# Altium PCB cs301_07.PcbDoc
Units mil, origin at the board's own origin, x right, y up, seen from the top; angles counter-clockwise.
Board outline 3420 x 4960 mil, 2 copper layers (Top Layer, Bottom Layer); 122 components, 84 nets, 356 pads, 161 vias.
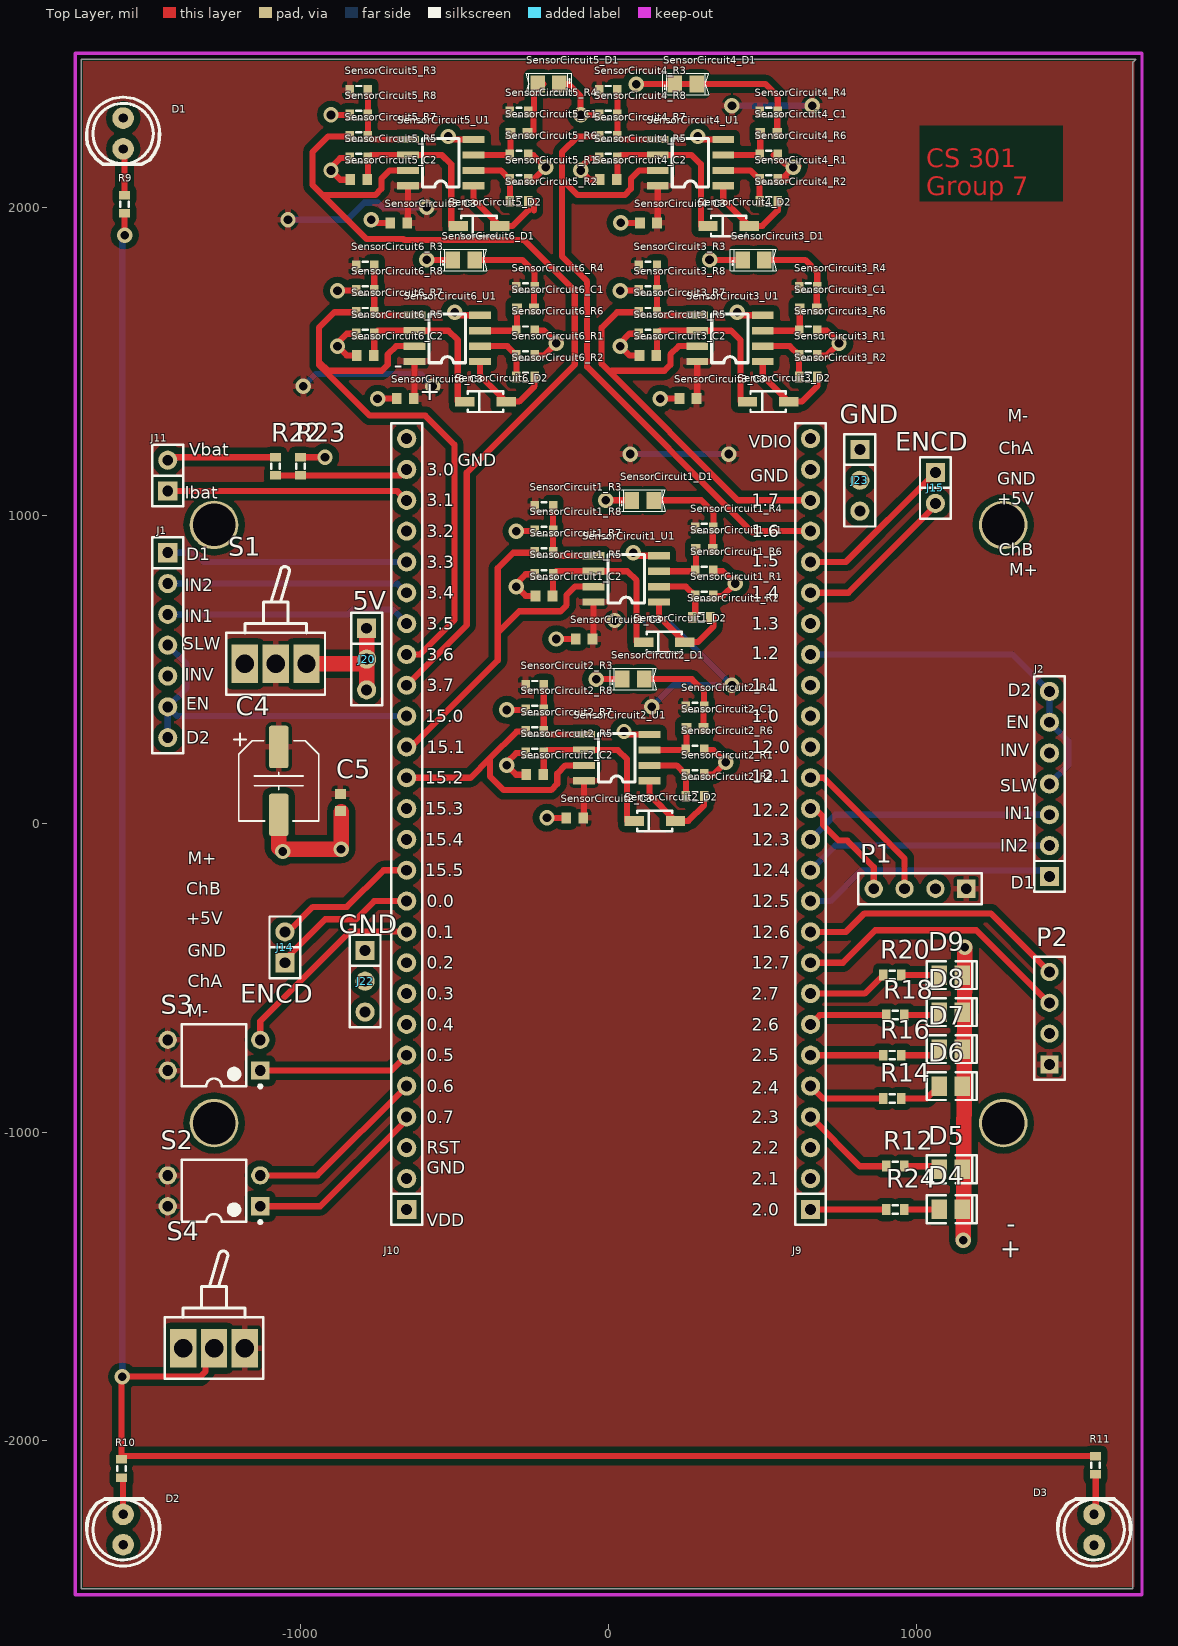
[diagram p0: Top Layer view]
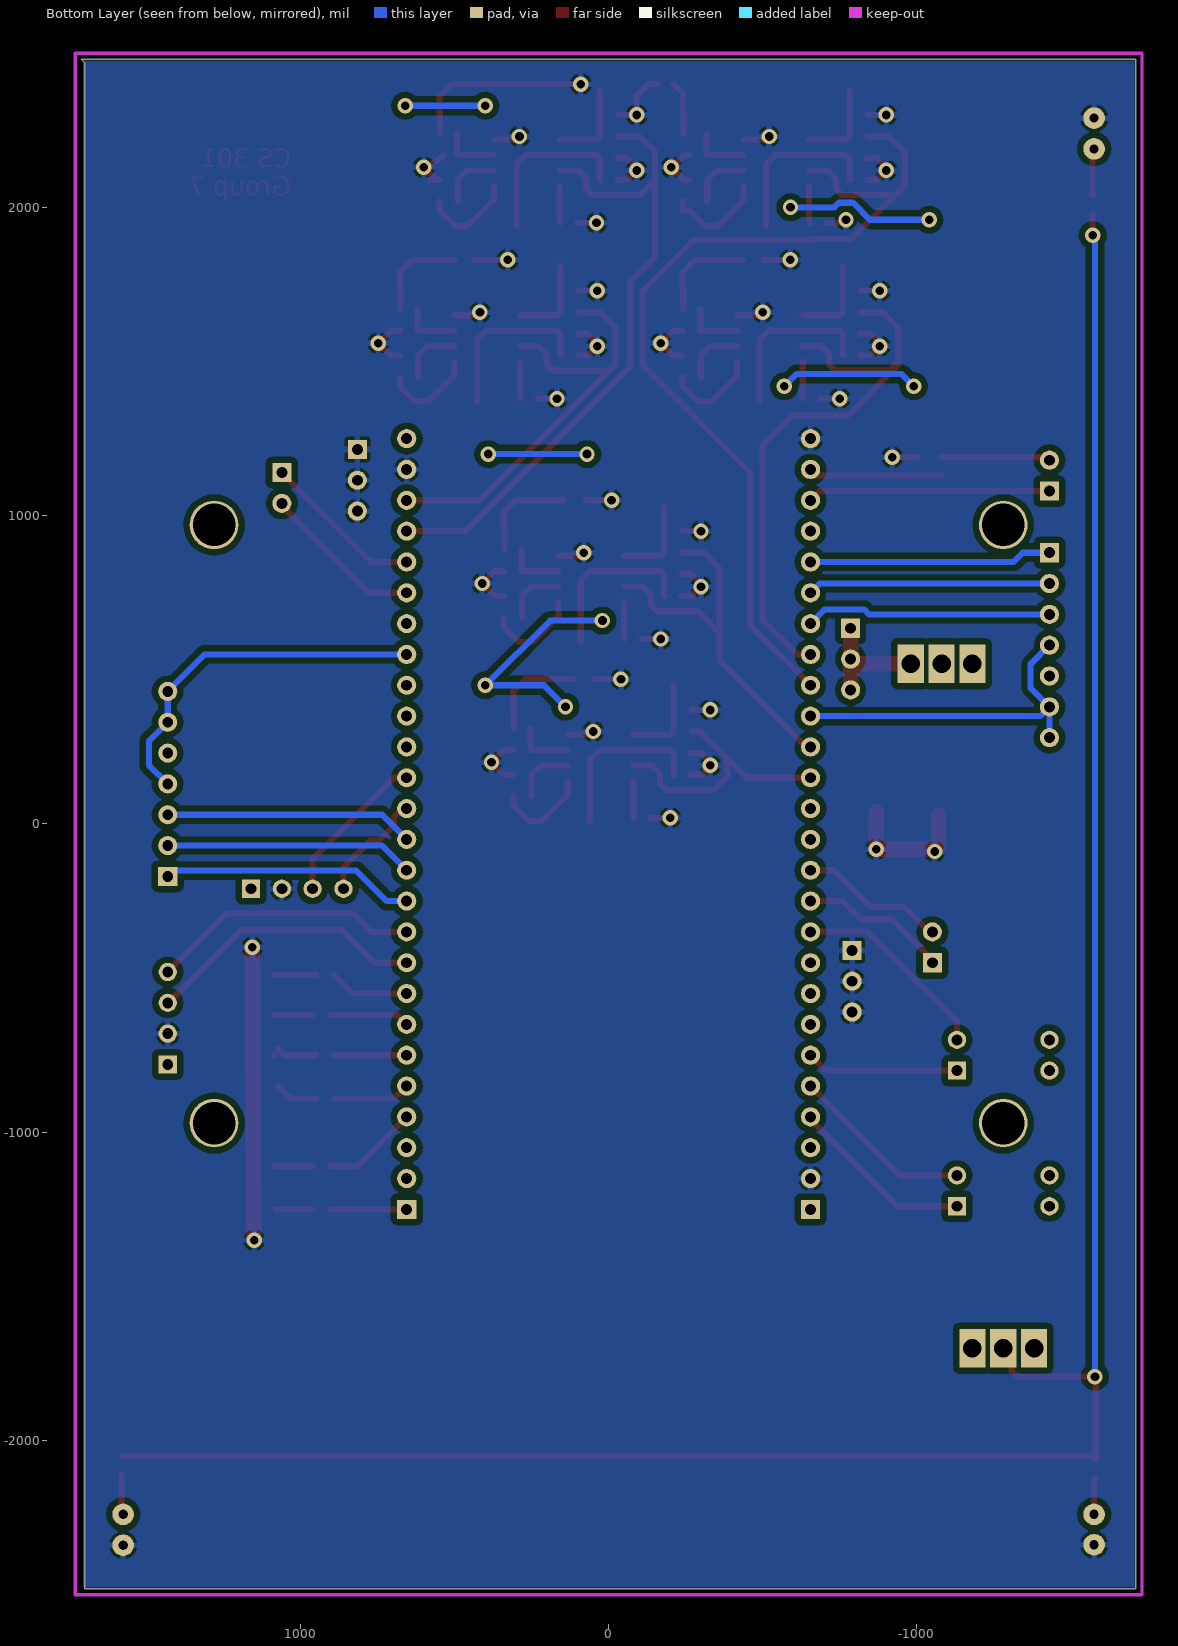
[diagram p1: Bottom Layer view, seen from below]

## Layer stack, top to bottom
Top Solder: solder mask 0.4, Solder Resist, Dk 3.5
Top Layer: signal copper 1.4
Dielectric1: dielectric 12.6, FR-4, Dk 4.8
Bottom Layer: signal copper 1.4
Bottom Solder: solder mask 0.4, Solder Resist, Dk 3.5

## Board outline
-1710,2480 1710,2480 1700,2470 1700,-2480 -1710,-2480

## Design rules (kind name [scope] priority, off if disabled: settings)
Clearance [All] p1: gap=20 ignorepadtopadclearanceinfootprint=FALSE
PolygonConnect [All] p1: connectstyle=Relief reliefconductorwidth=20 reliefentries=4 polygonreliefangle="90 Angle" airgapwidth=10
RoomDefinition SensorCircuit6 [InComponentClass('SensorCircuit6')] p1: confinementstyle=ConfineIn formatcopy=TRUE lockcomponents=FALSE outline -959.53,1320 -129.53,1320 -129.53,1880 -959.53,1880
RoomDefinition SensorCircuit5 [InComponentClass('SensorCircuit5')] p2: confinementstyle=ConfineIn formatcopy=TRUE lockcomponents=FALSE outline -1059.7,1890 -229.7,1890 -229.7,2450 -1059.7,2450
RoomDefinition SensorCircuit4 [InComponentClass('SensorCircuit4')] p3: confinementstyle=ConfineIn formatcopy=TRUE lockcomponents=FALSE outline -250,1890 580,1890 580,2450 -250,2450
RoomDefinition SensorCircuit3 [InComponentClass('SensorCircuit3')] p4: confinementstyle=ConfineIn formatcopy=TRUE lockcomponents=FALSE outline -42.6,1320 787.4,1320 787.4,1880 -42.6,1880
RoomDefinition SensorCircuit2 [InComponentClass('SensorCircuit2')] p5: confinementstyle=ConfineIn formatcopy=TRUE lockcomponents=FALSE outline -410,-40 420,-40 420,520 -410,520
RoomDefinition SensorCircuit1 [InComponentClass('SensorCircuit1')] p6: confinementstyle=ConfineIn formatcopy=TRUE lockcomponents=FALSE outline -379.53,540 450.47,540 450.47,1100 -379.53,1100
RoutingVias [All] p1: holewidth=28 width=50 viastyle="Through Hole" minholewidth=28 minwidth=50 maxholewidth=28 maxwidth=50
SilkToSolderMaskClearance SilkscreenOverComponentPads [IsPad] p1: minsilkscreentomaskgap=10 clearancetoexposedcopper=TRUE
SolderMaskExpansion [All] p1: expansion=4
Width [All] p1: maxlimit=25 minlimit=12 preferedwidth=20
29 further rules are at their usual default settings.

## Classes and differential pairs
component class SensorCircuit6: SensorCircuit6_C1 SensorCircuit6_C2 SensorCircuit6_C3 SensorCircuit6_D1 SensorCircuit6_D2 SensorCircuit6_R1 SensorCircuit6_R2 SensorCircuit6_R3 SensorCircuit6_R4 SensorCircuit6_R5 SensorCircuit6_R6 SensorCircuit6_R7 SensorCircuit6_R8 SensorCircuit6_U1
component class SensorCircuit5: SensorCircuit5_C1 SensorCircuit5_C2 SensorCircuit5_C3 SensorCircuit5_D1 SensorCircuit5_D2 SensorCircuit5_R1 SensorCircuit5_R2 SensorCircuit5_R3 SensorCircuit5_R4 SensorCircuit5_R5 SensorCircuit5_R6 SensorCircuit5_R7 SensorCircuit5_R8 SensorCircuit5_U1
component class SensorCircuit4: SensorCircuit4_C1 SensorCircuit4_C2 SensorCircuit4_C3 SensorCircuit4_D1 SensorCircuit4_D2 SensorCircuit4_R1 SensorCircuit4_R2 SensorCircuit4_R3 SensorCircuit4_R4 SensorCircuit4_R5 SensorCircuit4_R6 SensorCircuit4_R7 SensorCircuit4_R8 SensorCircuit4_U1
component class SensorCircuit3: SensorCircuit3_C1 SensorCircuit3_C2 SensorCircuit3_C3 SensorCircuit3_D1 SensorCircuit3_D2 SensorCircuit3_R1 SensorCircuit3_R2 SensorCircuit3_R3 SensorCircuit3_R4 SensorCircuit3_R5 SensorCircuit3_R6 SensorCircuit3_R7 SensorCircuit3_R8 SensorCircuit3_U1
component class SensorCircuit2: SensorCircuit2_C1 SensorCircuit2_C2 SensorCircuit2_C3 SensorCircuit2_D1 SensorCircuit2_D2 SensorCircuit2_R1 SensorCircuit2_R2 SensorCircuit2_R3 SensorCircuit2_R4 SensorCircuit2_R5 SensorCircuit2_R6 SensorCircuit2_R7 SensorCircuit2_R8 SensorCircuit2_U1
component class SensorCircuit1: SensorCircuit1_C1 SensorCircuit1_C2 SensorCircuit1_C3 SensorCircuit1_D1 SensorCircuit1_D2 SensorCircuit1_R1 SensorCircuit1_R2 SensorCircuit1_R3 SensorCircuit1_R4 SensorCircuit1_R5 SensorCircuit1_R6 SensorCircuit1_R7 SensorCircuit1_R8 SensorCircuit1_U1
channel class Sheet1: SensorProcessor1 SensorProcessor2 SensorProcessor3 SensorProcessor4 SensorProcessor5 SensorProcessor6
net class SO[1..6]: SO1 SO2 SO3 SO4 SO5 SO6

## Components (designator, comment, footprint, x,y, rotation, side; value= is the part's Value field where it differs from the comment)
C4 "22uF" ECE-CAPAE6.3X5.4SM -1070,140 r270 top
C5 "Cap Semi" 1608[0603] -870,70 r90 top value=15n
D1 "LED" LED0.1/5MM#1 -1574.8,2189.76 r180 top locked
D2 "LED" LED0.1/5MM#2 -1574.8,-2239.37 r0 top locked
D3 "LED" LED0.1/5MM#1 1574.8,-2239.37 r0 top locked
D4 "LED" ECE-LED2012-0805SM 1110,-1250 r0 top
D5 "LED" ECE-LED2012-0805SM 1110,-1120 r0 top
D6 "LED" ECE-LED2012-0805SM 1110,-850 r0 top
D7 "LED" ECE-LED2012-0805SM 1110,-730 r0 top
D8 "LED" ECE-LED2012-0805SM 1110,-610 r0 top
D9 "LED" ECE-LED2012-0805SM 1110,-490 r0 top
J1 "CON7" SIP7 -1430,880 r270 top locked
J2 "CON7" SIP7 1430,-170 r90 top locked
J9 "26PIN" SIP26 655,-1250 r90 top locked
J10 "26PIN" SIP26 -655,-1250 r90 top locked
J11 "Battery" sip2 -1430,1080 r90 top locked
J14 "ENCD" sip2 -1050,-450 r90 top locked
J15 "ENCD" sip2 1060,1140 r270 top locked
J20 "5V" sip3 -785,635 r270 top locked
J22 "GND" sip3 -790,-410 r270 top locked
J23 "GND" sip3 815,1215 r270 top locked
P1 "SerialHeader" HDR1X4 1160,-210 r180 top
P2 "SerialHeader" HDR1X4 1430,-780 r90 top
R9 "Res3" J1-0603 -1570,2010 r90 top value=150
R10 "Res3" J1-0603 -1580,-2090.47 r270 top value=150
R11 "Res3" J1-0603 1580,-2080 r270 top value=150
R12 "Res3" J1-0603 930,-1110 r0 top value=150
R14 "Res3" J1-0603 920,-890 r0 top value=150
R16 "Res3" J1-0603 920,-750 r0 top value=150
R18 "Res3" J1-0603 930,-620 r0 top value=150
R20 "Res3" J1-0603 920,-490 r0 top value=150
R22 "Res3" J1-0603 -1080,1160 r270 top value=100k
R23 "Res3" J1-0603 -1000,1160 r270 top value=100k
R24 "Res3" J1-0603 930,-1250 r0 top value=150
S1 "SW-SPDT" SW-SPDT -1180,520 r0 top
S2 "SW DIP-2" DIP-4 -1280,-1190 r180 top
S3 "SW DIP-2" DIP-4 -1280,-750 r180 top
S4 "SW-SPDT" SW-SPDT -1380,-1700 r0 top
SensorCircuit1_C1 "Cap Semi" 1608[0603] 310.47,890 r0 top value=15n (schematic designator C1)
SensorCircuit1_C2 "Cap Semi" 1608[0603] -209.53,740 r0 top value=680n (schematic designator C2)
SensorCircuit1_C3 "Cap Semi" 1608[0603] -79.53,600 r180 top value=100n (schematic designator C3)
SensorCircuit1_D1 "Value" ECE-SENSOR-0805SM 110.47,1050 r0 top (schematic designator D1)
SensorCircuit1_D2 "1N4148" ECE-DIO-SOD123SM 180.47,590 r180 top (schematic designator D2)
SensorCircuit1_R1 "Res3" J1-0603 310.47,740 r0 top value=100k (schematic designator R1)
SensorCircuit1_R2 "Res3" J1-0603 300.47,670 r0 top value=100k (schematic designator R2)
SensorCircuit1_R3 "Res3" J1-0603 -209.53,1030 r180 top value=100k (schematic designator R3)
SensorCircuit1_R4 "Res3" J1-0603 310.47,960 r180 top value=100k (schematic designator R4)
SensorCircuit1_R5 "Res3" J1-0603 -209.53,810 r0 top value=100k (schematic designator R5)
SensorCircuit1_R6 "Res3" J1-0603 310.47,820 r180 top value=100k (schematic designator R6)
SensorCircuit1_R7 "Res3" J1-0603 -209.53,880 r0 top value=100k (schematic designator R7)
SensorCircuit1_R8 "Res3" J1-0603 -209.53,950 r0 top value=100k (schematic designator R8)
SensorCircuit1_U1 "60MHz Opamp" SO-8 56.77,795 r180 top (schematic designator U1)
SensorCircuit2_C1 "Cap Semi" 1608[0603] 280,310 r0 top value=15n (schematic designator C1)
SensorCircuit2_C2 "Cap Semi" 1608[0603] -240,160 r0 top value=680n (schematic designator C2)
SensorCircuit2_C3 "Cap Semi" 1608[0603] -110,20 r180 top value=100n (schematic designator C3)
SensorCircuit2_D1 "Value" ECE-SENSOR-0805SM 80,470 r0 top (schematic designator D1)
SensorCircuit2_D2 "1N4148" ECE-DIO-SOD123SM 150,10 r180 top (schematic designator D2)
SensorCircuit2_R1 "Res3" J1-0603 280,160 r0 top value=100k (schematic designator R1)
SensorCircuit2_R2 "Res3" J1-0603 280,90 r0 top value=100k (schematic designator R2)
SensorCircuit2_R3 "Res3" J1-0603 -240,450 r180 top value=100k (schematic designator R3)
SensorCircuit2_R4 "Res3" J1-0603 280,380 r180 top value=100k (schematic designator R4)
SensorCircuit2_R5 "Res3" J1-0603 -240,230 r0 top value=100k (schematic designator R5)
SensorCircuit2_R6 "Res3" J1-0603 280,240 r180 top value=100k (schematic designator R6)
SensorCircuit2_R7 "Res3" J1-0603 -240,300 r0 top value=100k (schematic designator R7)
SensorCircuit2_R8 "Res3" J1-0603 -240,370 r0 top value=100k (schematic designator R8)
SensorCircuit2_U1 "60MHz Opamp" SO-8 26.3,215 r180 top (schematic designator U1)
SensorCircuit3_C1 "Cap Semi" 1608[0603] 647.4,1670 r0 top value=15n (schematic designator C1)
SensorCircuit3_C2 "Cap Semi" 1608[0603] 127.4,1520 r0 top value=680n (schematic designator C2)
SensorCircuit3_C3 "Cap Semi" 1608[0603] 257.4,1380 r180 top value=100n (schematic designator C3)
SensorCircuit3_D1 "Value" ECE-SENSOR-0805SM 470,1830 r0 top (schematic designator D1)
SensorCircuit3_D2 "1N4148" ECE-DIO-SOD123SM 517.4,1370 r180 top (schematic designator D2)
SensorCircuit3_R1 "Res3" J1-0603 647.4,1520 r0 top value=100k (schematic designator R1)
SensorCircuit3_R2 "Res3" J1-0603 647.4,1450 r0 top value=100k (schematic designator R2)
SensorCircuit3_R3 "Res3" J1-0603 127.4,1810 r180 top value=100k (schematic designator R3)
SensorCircuit3_R4 "Res3" J1-0603 647.4,1740 r180 top value=100k (schematic designator R4)
SensorCircuit3_R5 "Res3" J1-0603 127.4,1590 r0 top value=100k (schematic designator R5)
SensorCircuit3_R6 "Res3" J1-0603 647.4,1600 r180 top value=100k (schematic designator R6)
SensorCircuit3_R7 "Res3" J1-0603 127.4,1660 r0 top value=100k (schematic designator R7)
SensorCircuit3_R8 "Res3" J1-0603 127.4,1730 r0 top value=100k (schematic designator R8)
SensorCircuit3_U1 "60MHz Opamp" SO-8 393.7,1575 r180 top (schematic designator U1)
SensorCircuit4_C1 "Cap Semi" 1608[0603] 519.23,2240 r0 top value=15n (schematic designator C1)
SensorCircuit4_C2 "Cap Semi" 1608[0603] -0.77,2090 r0 top value=680n (schematic designator C2)
SensorCircuit4_C3 "Cap Semi" 1608[0603] 129.23,1950 r180 top value=100n (schematic designator C3)
SensorCircuit4_D1 "Value" ECE-SENSOR-0805SM 250,2400 r0 top (schematic designator D1)
SensorCircuit4_D2 "1N4148" ECE-DIO-SOD123SM 389.23,1940 r180 top (schematic designator D2)
SensorCircuit4_R1 "Res3" J1-0603 519.23,2090 r0 top value=100k (schematic designator R1)
SensorCircuit4_R2 "Res3" J1-0603 519.23,2020 r0 top value=100k (schematic designator R2)
SensorCircuit4_R3 "Res3" J1-0603 -0.77,2380 r180 top value=100k (schematic designator R3)
SensorCircuit4_R4 "Res3" J1-0603 519.23,2310 r180 top value=100k (schematic designator R4)
SensorCircuit4_R5 "Res3" J1-0603 -0.77,2160 r0 top value=100k (schematic designator R5)
SensorCircuit4_R6 "Res3" J1-0603 519.23,2170 r180 top value=100k (schematic designator R6)
SensorCircuit4_R7 "Res3" J1-0603 -0.77,2230 r0 top value=100k (schematic designator R7)
SensorCircuit4_R8 "Res3" J1-0603 -0.77,2300 r0 top value=100k (schematic designator R8)
SensorCircuit4_U1 "60MHz Opamp" SO-8 265.53,2145 r180 top (schematic designator U1)
SensorCircuit5_C1 "Cap Semi" 1608[0603] -290.47,2240 r0 top value=15n (schematic designator C1)
SensorCircuit5_C2 "Cap Semi" 1608[0603] -810.47,2090 r0 top value=680n (schematic designator C2)
SensorCircuit5_C3 "Cap Semi" 1608[0603] -680.47,1950 r180 top value=100n (schematic designator C3)
SensorCircuit5_D1 "Value" ECE-SENSOR-0805SM -195.13,2400 r180 top (schematic designator D1)
SensorCircuit5_D2 "1N4148" ECE-DIO-SOD123SM -420.47,1940 r180 top (schematic designator D2)
SensorCircuit5_R1 "Res3" J1-0603 -290.47,2090 r0 top value=100k (schematic designator R1)
SensorCircuit5_R2 "Res3" J1-0603 -290.47,2020 r0 top value=100k (schematic designator R2)
SensorCircuit5_R3 "Res3" J1-0603 -810.47,2380 r180 top value=100k (schematic designator R3)
SensorCircuit5_R4 "Res3" J1-0603 -290.47,2310 r180 top value=100k (schematic designator R4)
SensorCircuit5_R5 "Res3" J1-0603 -810.47,2160 r0 top value=100k (schematic designator R5)
SensorCircuit5_R6 "Res3" J1-0603 -290.47,2170 r180 top value=100k (schematic designator R6)
SensorCircuit5_R7 "Res3" J1-0603 -810.47,2230 r0 top value=100k (schematic designator R7)
SensorCircuit5_R8 "Res3" J1-0603 -810.47,2300 r0 top value=100k (schematic designator R8)
SensorCircuit5_U1 "60MHz Opamp" SO-8 -544.17,2145 r180 top (schematic designator U1)
SensorCircuit6_C1 "Cap Semi" 1608[0603] -269.53,1670 r0 top value=15n (schematic designator C1)
SensorCircuit6_C2 "Cap Semi" 1608[0603] -789.53,1520 r0 top value=680n (schematic designator C2)
SensorCircuit6_C3 "Cap Semi" 1608[0603] -659.53,1380 r180 top value=100n (schematic designator C3)
SensorCircuit6_D1 "Value" ECE-SENSOR-0805SM -469.53,1830 r0 top (schematic designator D1)
SensorCircuit6_D2 "1N4148" ECE-DIO-SOD123SM -399.53,1370 r180 top (schematic designator D2)
SensorCircuit6_R1 "Res3" J1-0603 -269.53,1520 r0 top value=100k (schematic designator R1)
SensorCircuit6_R2 "Res3" J1-0603 -269.53,1450 r0 top value=100k (schematic designator R2)
SensorCircuit6_R3 "Res3" J1-0603 -789.53,1810 r180 top value=100k (schematic designator R3)
SensorCircuit6_R4 "Res3" J1-0603 -269.53,1740 r180 top value=100k (schematic designator R4)
SensorCircuit6_R5 "Res3" J1-0603 -789.53,1590 r0 top value=100k (schematic designator R5)
SensorCircuit6_R6 "Res3" J1-0603 -269.53,1600 r180 top value=100k (schematic designator R6)
SensorCircuit6_R7 "Res3" J1-0603 -789.53,1660 r0 top value=100k (schematic designator R7)
SensorCircuit6_R8 "Res3" J1-0603 -789.53,1730 r0 top value=100k (schematic designator R8)
SensorCircuit6_U1 "60MHz Opamp" SO-8 -523.23,1575 r180 top (schematic designator U1)

## Footprints (in the part's own frame and the unit in brackets; to place one, negate y for a bottom-side part, rotate by r counter-clockwise, add the part's x,y. Pads: shape width x height; smd on the part's side, far side on the other; paste and mask are expansions set on the pad)
1608[0603] [mm] "Chip Capacitor, Body 1.6x0.8mm, IPC High Density"
  rect 0.8x0.9 smd: 1(-0.7,0) 2(0.7,0)
  body extent -0.87,-0.48 0.87,0.48, height 1.3
DIP-4 [mm] "DIP; 4 Leads; Row Spacing 7.62 mm; Pitch 2.54 mm"
  rect 1.5x1.5 hole 0.9: 1(-3.81,1.27)
  round 1.5 hole 0.9: 2(-3.81,-1.27) 3(3.81,-1.27) 4(3.81,1.27)
  silkscreen extent -3.94,-2.55 2.65,2.69, body extent -3.15,-2.5 3.15,2.5, height 5.6
ECE-CAPAE6.3X5.4SM [mm] "Capacitor, polarized, aluminum can; 6.3x5.4mm DxH"
  round 0.508 on Mech15: 0(0,0)
  rrect25% 3.5x1.6 smd: 1(-2.8,0) 2(2.8,0)
  silkscreen extent -3.9,-3.7 3.3,3.3, body extent -3.3,-3.3 3.3,3.3, height 4.23
ECE-DIO-SOD123SM [mm] "SOD-123; 2 Leads; Body 2.7 x 1.6 mm, (LxW)"
  rect 1.6x0.8 smd: 1(-1.7,0) 2(1.7,0)
  silkscreen extent -1.45,-0.85 1.45,0.85
ECE-LED2012-0805SM [mm] "RED AS AlGaAs SMD LED, Body; 2mm x 1.25 mm (LxW)"
  rect 1.3x1.6 smd: 1(-0.95,0) 2(0.95,0)
  silkscreen extent -2,-1.15 2.13,1.15
ECE-SENSOR-0805SM [mm] "Chip Sensor, Body 2.0x1.3mm, IPC Medium Density"
  rect 1.2x1.4 smd: 1(-0.9,0) 2(0.9,0)
  silkscreen extent -1.91,-0.89 1.88,0.89
HDR1X4 [mm] "Connector; Header; 4 Position"
  rect 1.5x1.5 hole 0.9: 1(0,0)
  round 1.5 hole 0.9: 2(2.54,0) 3(5.08,0) 4(7.62,0)
  silkscreen extent -1.27,-1.27 8.89,1.27
J1-0603 [mm] "Chip Resistor, Body 1.6x0.8mm, IPC High Density"
  rect 0.7x0.9 smd: 1(-0.75,0) 2(0.75,0)
  silkscreen extent -0.2,-0.35 0.2,0.35, body extent -0.85,-0.48 0.85,0.48, height 0.9
LED0.1/5MM#1 [mil]
  round 70 hole 30: A(0,0) K(0,-100)
  silkscreen extent -118,-168 118,50
LED0.1/5MM#2 [mil]
  round 70 hole 30: A(0,0) K(0,-98.43)
  silkscreen extent -118,-168 118,50
sip2 [mil]
  rect 62x62 hole 35.43: 1(0,0)
  round 62 hole 35.43: 2(100,0)
  silkscreen extent -50,-50 150,50
sip3 [mil]
  rect 62x62 hole 35.43: 1(0,0)
  round 62 hole 35.43: 2(100,0) 3(200,0)
  silkscreen extent -50,-50 250,50
SIP7 [mil]
  rect 62x62 hole 35.43: 1(0,0)
  round 62 hole 35.43: 2(100,0) 3(200,0) 4(300,0) 5(400,0) 6(500,0) 7(600,0)
  silkscreen extent -50,-50 650,50
SIP26 [mil]
  rect 62x62 hole 35.43: 1(0,0)
  round 62 hole 35.43: 2(100,0) 3(200,0) 4(300,0) 5(400,0) 6(500,0) 7(600,0) 8(700,0) 9(800,0) 10(900,0) 11(1000,0) 12(1100,0) 13(1200,0) 14(1300,0) 15(1400,0) 16(1500,0) 17(1600,0) 18(1700,0) 19(1800,0) 20(1900,0) 21(2000,0) 22(2100,0) 23(2200,0) 24(2300,0) 25(2400,0) 26(2500,0)
  silkscreen extent -50,-50 2550,50
SO-8 [mm]
  rect 1.8x0.6 smd: 1(-2.7,1.905) 2(-2.7,0.635) 3(-2.7,-0.635) 4(-2.7,-1.905) 5(2.7,-1.905) 6(2.7,-0.635) 7(2.7,0.635) 8(2.7,1.905)
  silkscreen extent -1.5,-2 1.5,2, body extent -2,-2.5 2,2.5, height 1.8
SW-SPDT [mil]
  rect 85x125 hole 60: 1(0,0) 2(100,0) 3(200,0)
  silkscreen extent -60,-100 260,315

## Part data
C4: library part "CAP 22uF/35V SM", "Polarized Capacitor (Radial)", Revision="July-2002: Re-released for DXP Platform."
C5 SensorCircuit1_C1 SensorCircuit1_C2 SensorCircuit1_C3 SensorCircuit2_C1 SensorCircuit2_C2 SensorCircuit2_C3 SensorCircuit3_C1 SensorCircuit3_C2 SensorCircuit3_C3 SensorCircuit4_C1 SensorCircuit4_C2 SensorCircuit4_C3 SensorCircuit5_C1 SensorCircuit5_C2 SensorCircuit5_C3 SensorCircuit6_C1 SensorCircuit6_C2 SensorCircuit6_C3: "Capacitor (Semiconductor SIM Model)", LatestRevisionDate=29-May-2009, LatestRevisionNote="IPC-7351 Footprint Added.", PackageDescription="Chip Capacitor", PackageReference=C1206, Published=8-Jun-2000, Publisher="Altium Limited"
D4 D5 D6 D7 D8 D9: library part DIO000104, "LED GREEN CLEAR 0805 SM", UoA Stock#=DIO000104
J1 J2: "Connector"
J11 J14 J15: library part CON2, "Connector"
J20 J22 J23: library part CON3, "Connector"
P1 P2: library part "Header 4", "Header, 4-Pin", LatestRevisionDate=17-Jul-2002, LatestRevisionNote="Re-released for DXP Platform.", Publisher="Altium Limited"
R9 R10 R11 R12 R14 R16 R18 R20 R22 R23 R24 SensorCircuit1_R1 SensorCircuit1_R2 SensorCircuit1_R3 SensorCircuit1_R4 SensorCircuit1_R5 SensorCircuit1_R6 SensorCircuit1_R7 SensorCircuit1_R8 SensorCircuit2_R1 SensorCircuit2_R2 SensorCircuit2_R3 SensorCircuit2_R4 SensorCircuit2_R5 SensorCircuit2_R6 SensorCircuit2_R7 SensorCircuit2_R8 SensorCircuit3_R1 SensorCircuit3_R2 SensorCircuit3_R3 SensorCircuit3_R4 SensorCircuit3_R5 SensorCircuit3_R6 SensorCircuit3_R7 SensorCircuit3_R8 SensorCircuit4_R1 SensorCircuit4_R2 SensorCircuit4_R3 SensorCircuit4_R4 SensorCircuit4_R5 SensorCircuit4_R6 SensorCircuit4_R7 SensorCircuit4_R8 SensorCircuit5_R1 SensorCircuit5_R2 SensorCircuit5_R3 SensorCircuit5_R4 SensorCircuit5_R5 SensorCircuit5_R6 SensorCircuit5_R7 SensorCircuit5_R8 SensorCircuit6_R1 SensorCircuit6_R2 SensorCircuit6_R3 SensorCircuit6_R4 SensorCircuit6_R5 SensorCircuit6_R6 SensorCircuit6_R7 SensorCircuit6_R8: "Resistor", LatestRevisionDate=29-May-2009, LatestRevisionNote="IPC-7351 Footprint Added.", PackageDescription="Chip Resistor", PackageReference=J1-0603, Published=8-Jun-2000, Publisher="Altium Limited"
S1 S4: "Toggle Switch"
S2 S3: "DIP Switch, 2 Position, SPST", LatestRevisionDate=17-Jul-2002, LatestRevisionNote="Re-released for DXP Platform.", PackageReference=DIP-4, Published=24-Mar-1999, Publisher="Altium Limited"
SensorCircuit1_D1 SensorCircuit2_D1 SensorCircuit3_D1 SensorCircuit4_D1 SensorCircuit5_D1 SensorCircuit6_D1: library part TEMT6200, "Light Sensor TEMT6200", Revision="July-2002: Re-released for DXP Platform."
SensorCircuit1_D2 SensorCircuit2_D2 SensorCircuit3_D2 SensorCircuit4_D2 SensorCircuit5_D2 SensorCircuit6_D2: library part "DiODE 4148 SM", "Diode"
SensorCircuit1_U1 SensorCircuit2_U1 SensorCircuit3_U1 SensorCircuit4_U1 SensorCircuit5_U1 SensorCircuit6_U1: library part LT6221

## Free pads (board coordinates)
  round 157.48 hole 137.8 unplated: 0(-1280,-970) 0(-1280,970) 0(1280,-970) 0(1280,970)

## Via types
v1: diameter 50, hole 28, Top Layer to Bottom Layer, 161 vias

## Nets (pads, with @x,y where several pads share a name; then routed paths per layer and width w, separated by ;. In a path a pad name is that pad's centre, name@x,y a point inside that pad or via, vN(x,y) a via of type N, cw(c..) or ccw(c..) an arc to the next point about the centre after c; other vN are vias at no path point)
5V0: J20.1 J20.2 J20.3 S1.3 | length 401.2
  Top Layer w20: J20.2@-800,520 v1(-785,535)
  Top Layer w50: v1(-980,520) J20.2@-800,520 ; v1(-785,435) v1(-785,535) v1(-785,635)
DIP0: J10.4 S2.1 | length 600.7
  Top Layer w20: v1(-1130,-1240) -935.47,-1240 -655,-959.53 v1(-655,-950)
DIP1: J10.5 S2.2 | length 595.1
  Top Layer w20: v1(-1130,-1140) -945,-1140 v1(-655,-850)
DIP2: J10.6 S3.1 | length 495.7
  Top Layer w20: v1(-1130,-800) -705,-800 v1(-655,-750)
DIP3: J10.10 S3.2 | length 656.5
  Top Layer w20: v1(-1130,-700) -1130,-640 -839,-349 -655,-349 v1(-655,-350)
GND: C4.2 C5.1 D1.K D2.K D3.K D4.2 D5.2 D6.2 D7.2 D8.2 D9.2 J9.25 J10.2 J10.26 J22.1 J22.2 J22.3 J23.1 J23.2 J23.3 P1.2 P2.2 R23.1 SensorCircuit1_C2.1 SensorCircuit1_C3.2 SensorCircuit1_D1.1 SensorCircuit1_R1.2 SensorCircuit1_R5.1 SensorCircuit1_R6.1 SensorCircuit1_R8.1 SensorCircuit1_U1.4 SensorCircuit2_C2.1 SensorCircuit2_C3.2 SensorCircuit2_D1.1 SensorCircuit2_R1.2 SensorCircuit2_R5.1 SensorCircuit2_R6.1 SensorCircuit2_R8.1 SensorCircuit2_U1.4 SensorCircuit3_C2.1 SensorCircuit3_C3.2 SensorCircuit3_D1.1 SensorCircuit3_R1.2 SensorCircuit3_R5.1 SensorCircuit3_R6.1 SensorCircuit3_R8.1 SensorCircuit3_U1.4 SensorCircuit4_C2.1 SensorCircuit4_C3.2 SensorCircuit4_D1.1 SensorCircuit4_R1.2 SensorCircuit4_R5.1 SensorCircuit4_R6.1 SensorCircuit4_R8.1 SensorCircuit4_U1.4 SensorCircuit5_C2.1 SensorCircuit5_C3.2 SensorCircuit5_D1.1 SensorCircuit5_R1.2 SensorCircuit5_R5.1 SensorCircuit5_R6.1 SensorCircuit5_R8.1 SensorCircuit5_U1.4 SensorCircuit6_C2.1 SensorCircuit6_C3.2 SensorCircuit6_D1.1 SensorCircuit6_R1.2 SensorCircuit6_R5.1 SensorCircuit6_R6.1 SensorCircuit6_R8.1 SensorCircuit6_U1.4 | length 5439.5
  Top Layer w20: v1@-1070,-76.61 v1(-1057.31,-89.31) v1@-1050.09,-82.09 ; R23.1 -920.47,1189.53 v1(-920,1190) ; v1(-900.47,2300) SensorCircuit5_R8.1 ; v1(-879.53,1730) SensorCircuit6_R8.1 ; C5.1 C5.1@-867.91,40.35 ; SensorCircuit5_C2.1 -870.47,2090 v1(-900.47,2120) -900.47,2130 -870.47,2160 SensorCircuit5_R5.1 SensorCircuit5_R5.1@-838.03,2158.03 ; SensorCircuit6_C2.1 -849.53,1520 v1(-879.53,1550) -879.53,1560 -849.53,1590 SensorCircuit6_R5.1 SensorCircuit6_R5.1@-817.09,1588.03 ; v1(-770,1960) -770,1950.47 -770.47,1950 SensorCircuit5_C3.2 ; v1(-749.53,1380) SensorCircuit6_C3.2 ; v1(-589.53,1830) SensorCircuit6_D1.1 ; v1(-520.47,2230) -510.47,2220 SensorCircuit5_U1.4 ; v1(-499.53,1660) -489.53,1650 SensorCircuit6_U1.4 ; v1(-330,370) SensorCircuit2_R8.1 ; v1(-299.53,950) SensorCircuit1_R8.1 ; SensorCircuit2_C2.1 -300,160 v1(-330,190) -330,200 -300,230 SensorCircuit2_R5.1 SensorCircuit2_R5.1@-267.56,228.03 ; SensorCircuit5_R1.2 SensorCircuit5_R1.2@-250,2090 ; SensorCircuit5_R6.1 SensorCircuit5_R6.1@-250,2170 ; -243.75,2090 v1(-203.75,2130) -243.75,2170 ; SensorCircuit6_R1.2 -209.53,1520 v1(-169.53,1560) -209.53,1600 SensorCircuit6_R6.1 ; SensorCircuit1_C2.1 -269.53,740 v1(-299.53,770) -299.53,780 -269.53,810 SensorCircuit1_R5.1 SensorCircuit1_R5.1@-237.09,808.03 ; v1(-200,20) SensorCircuit2_C3.2 ; v1(-169.53,600) SensorCircuit1_C3.2 ; SensorCircuit5_D1.1 -130,2400 -90.77,2360.77 v1(-90.77,2300) SensorCircuit4_R8.1 ; v1(-40,470) SensorCircuit2_D1.1 ; SensorCircuit4_C2.1 -60.77,2090 v1(-90.77,2120) -90.77,2130 -60.77,2160 SensorCircuit4_R5.1 SensorCircuit4_R5.1@-28.33,2158.03 ; v1(-9.53,1050) SensorCircuit1_D1.1 ; v1(37.4,1730) SensorCircuit3_R8.1 ; v1(39.23,1950) SensorCircuit4_C3.2 ; v1(50,300) 60,290 SensorCircuit2_U1.4 ; v1(80.47,880) 90.47,870 SensorCircuit1_U1.4 ; v1(90,2400) SensorCircuit4_D1.1 283.8,2400 ; SensorCircuit3_C2.1 67.4,1520 v1(37.4,1550) 37.4,1560 67.4,1590 SensorCircuit3_R5.1 SensorCircuit3_R5.1@99.84,1588.03 ; v1(167.4,1380) SensorCircuit3_C3.2 ; v1(289.23,2230) 299.23,2220 SensorCircuit4_U1.4 ; SensorCircuit2_R1.2 340,160 v1(380,200) 340,240 SensorCircuit2_R6.1 ; v1(327.4,1830) SensorCircuit3_D1.1 ; SensorCircuit1_R1.2 370.47,740 v1(410.47,780) 370.47,820 SensorCircuit1_R6.1 ; v1(417.4,1660) 427.4,1650 SensorCircuit3_U1.4 ; SensorCircuit4_R6.1@535.78,2170 SensorCircuit4_R6.1@544.93,2164.08 ; SensorCircuit4_R6.1@538.67,2164.08 543.08,2161.23 583,2135.4 597.41,2138.48 605.9,2140.3 616.2,2133.64 v1(599.23,2130) SensorCircuit4_R1.2@559.23,2090 ; SensorCircuit4_R1.2 SensorCircuit4_R1.2@559.23,2090 ; 579.23,2090 SensorCircuit4_R1.2@559.23,2090 ; SensorCircuit3_R1.2 707.4,1520 v1(747.4,1560) 707.4,1600 SensorCircuit3_R6.1
  Top Layer w50: v1@-1070,-76.61 C4.2 ; v1@-1050.09,-82.09 v1(-867.91,-82.09) C5.1@-867.91,40.35 ; v1@1150.87,-1350 1151.35,-1250.02 1151.97,-1120.02 1152.5,-1010.23 1153.08,-890.03 1153.27,-850.03 1153.7,-759.99 D7.2@1153.75,-750.03 ; D7.2@1153.75,-749.98 1153.85,-730.03 1154.38,-620.03 1154.42,-610.03 1155,-490.04 v1(1155.43,-400)
  other v1: 1574.8,-2339.37 -1574.8,-2337.8 1150,-1350 -655,-1150 1430,-680 -790,-610 -790,-510 -790,-410 1060,-210 815,1015 815,1115 655,1150 660,1150 815,1215 -655,1250 -1574.8,2289.76
NetD1_A: D1.A R9.2 | length 152.2
  Top Layer w20: v1(-1574.8,2189.76) -1570,2184.96 R9.2
NetD2_A: D2.A R10.2 | length 121.5
  Top Layer w20: R10.2 -1574.8,-2125.2 v1(-1574.8,-2239.37)
NetD3_A: D3.A R11.2 | length 132
  Top Layer w20: v1(1574.8,-2239.37) 1580,-2234.17 R11.2
NetD4_1: D4.1 R24.2 | length 120.5
  Top Layer w20: R24.2 D4.1 D4.1@1080,-1250
NetD5_1: D5.1 R12.2 | length 125
  Top Layer w20: R12.2 D5.1@1084.57,-1110
NetD6_1: D6.1 R14.2 | length 139.6
  Top Layer w20: R14.2 1032.6,-890 D6.1
NetD7_1: D7.1 R16.2 | length 131.4
  Top Layer w20: R16.2 1052.6,-750 D7.1
NetD8_1: D8.1 R18.2 | length 125
  Top Layer w20: R18.2 D8.1@1084.57,-620
NetD9_1: D9.1 R20.2 | length 135
  Top Layer w20: R20.2 D9.1@1084.57,-490
NetJ1_1: J1.1 J10.22 | length 787.4
  Bottom Layer w20: v1(-1430,880) -1343.78,880 -1313.78,850 v1(-655,850)
NetJ1_2: J1.2 J10.21 | length 787.4
  Bottom Layer w20: v1(-1430,780) -685,780 v1(-655,750)
NetJ1_3: J1.3 J10.20 | length 800.7
  Bottom Layer w20: v1(-1430,680) -844.43,680 -828.43,696 -701,696 v1(-655,650)
NetJ1_4: J1.4 J1.6 J1.7 J10.17 | length 1138
  Bottom Layer w20: v1(-1430,280) v1(-1430,380) ; v1(-1430,580) -1369,519 -1369,441 v1(-1430,380) ; v1(-655,350) -1400,350 v1(-1430,380)
NetJ2_1: J2.1 J9.11 | length 840.6
  Bottom Layer w20: v1(655,-250) 720,-250 819.53,-150.47 1410.47,-150.47 v1(1430,-170) 1436.74,-170 J2.1@1430,-163.26
NetJ2_2: J2.2 J9.12 | length 808.1
  Bottom Layer w20: v1(655,-150) 735,-70 v1(1430,-70)
NetJ2_3: J2.3 J9.13 | length 808.1
  Bottom Layer w20: v1(655,-50) 735,30 v1(1430,30)
NetJ2_4: J2.4 J2.6 J2.7 J9.19 | length 1175.2
  Bottom Layer w20: v1(655,550) 1310,550 v1(1430,430) v1(1430,330) 1491,269 1491,191 v1(1430,130)
NetJ9_1: J9.1 R24.1 | length 245.5
  Top Layer w20: v1(655,-1250) R24.1
NetJ9_4: J9.4 R12.1 | length 311.7
  Top Layer w20: v1(655,-950) 815,-1110 R12.1
NetJ9_5: J9.5 R14.1 | length 252
  Top Layer w20: v1(655,-850) 695,-890 R14.1
NetJ9_6: J9.6 R16.1 | length 235.5
  Top Layer w20: v1(655,-750) R16.1
NetJ9_7: J9.7 R18.1 | length 257.9
  Top Layer w20: v1(655,-650) 685,-620 R18.1
NetJ9_8: J9.8 R20.1 | length 260.3
  Top Layer w20: v1(655,-550) 830.47,-550 R20.1
NetJ9_21: J9.21 J15.2 | length 536
  Top Layer w20: v1(655,750) 777.78,750 1060,1032.22 J15.2@1070,1022.22
  other v1: 1060,1040
NetJ9_22: J9.22 J15.1 | length 511
  Top Layer w20: v1(655,850) 770,850 J15.1@1050,1130
  other v1: 1060,1140
NetJ10_11: J10.11 J14.1 | length 483.7
  Top Layer w20: v1(-1050,-450) -1050,-440 -919,-309 -819,-309 -760,-250 v1(-655,-250)
NetJ10_12: J10.12 J14.2 | length 477.8
  Top Layer w20: v1(-1050,-350) -1040,-350 -959,-269 -849,-269 -730,-150 v1(-655,-150)
NetJ10_24: J10.24 J11.1 | length 787.4
  Top Layer w20: v1(-1430,1080) -685,1080 v1(-655,1050)
NetJ10_25: J10.25 R22.2 R23.2 | length 433.1
  Top Layer w20: R22.2 R23.2 -674.53,1130.47 v1(-655,1150)
NetJ11_2: J11.2 R22.1 | length 353.9
  Top Layer w20: v1(-1430,1180) -1420.47,1189.53 R22.1
NetR9_1: R9.1 R10.1 R11.1 S4.2 | length 7580.5
  Top Layer w20: R10.1 -1580,-1790 v1(-1577.5,-1792.5) -1570,-1792.5 -1325.07,-1792.5 -1307.5,-1774.93 -1307.5,-1700 v1(-1280,-1700) ; R10.1@-1570,-2050.94 -1569.53,-2050.47 R11.1 ; v1(-1570,1910) R9.1
  Bottom Layer w20: v1(-1577.5,-1792.5) -1577.5,1902.5 v1(-1570,1910)
NetSensorCircuit1_C1_1: SensorCircuit1_C1.1 SensorCircuit1_R6.2 SensorCircuit1_U1.3 | length 188.7
  Top Layer w20: SensorCircuit1_U1.3 SensorCircuit1_R6.2 282.91,821.97 SensorCircuit1_C1.1
NetSensorCircuit1_C1_2: SensorCircuit1_C1.2 SensorCircuit1_D1.2 SensorCircuit1_R4.1 | length 331.8
  Top Layer w20: SensorCircuit1_D1.2 300.47,1050 340,1010.47 SensorCircuit1_R4.1 338.03,958.03 SensorCircuit1_C1.2
NetSensorCircuit1_C2_2: SensorCircuit1_C2.2 SensorCircuit1_D2.2 SensorCircuit1_R5.2 SensorCircuit1_U1.6 | length 557.9
  Top Layer w20: SensorCircuit1_C2.2 -180,741.97 SensorCircuit1_R5.2 -170,820 SensorCircuit1_U1.6 60.47,820 90.47,790 SensorCircuit1_D2.2@90.47,590
NetSensorCircuit1_D2_1: SensorCircuit1_D2.1 SensorCircuit1_R2.2 SensorCircuit1_U1.1 | length 308
  Top Layer w20: SensorCircuit1_U1.1 163.07,674.33 SensorCircuit1_D2.1 289.53,590 340,640.47 SensorCircuit1_R2.2@340,670
NetSensorCircuit1_R1_1: SensorCircuit1_R1.1 SensorCircuit1_R2.1 SensorCircuit1_U1.2 | length 200.3
  Top Layer w20: SensorCircuit1_U1.2 250.95,770 SensorCircuit1_R1.1 SensorCircuit1_R2.1@280.94,670
NetSensorCircuit1_R3_1: SensorCircuit1_R3.1 SensorCircuit1_R7.2 SensorCircuit1_R8.2 SensorCircuit1_U1.5 | length 284.6
  Top Layer w20: SensorCircuit1_R3.1 SensorCircuit1_R8.2 SensorCircuit1_R7.2 -170,870 SensorCircuit1_U1.5
NetSensorCircuit2_C1_1: SensorCircuit2_C1.1 SensorCircuit2_R6.2 SensorCircuit2_U1.3 | length 188.7
  Top Layer w20: SensorCircuit2_U1.3 SensorCircuit2_R6.2 252.44,241.97 SensorCircuit2_C1.1
NetSensorCircuit2_C1_2: SensorCircuit2_C1.2 SensorCircuit2_D1.2 SensorCircuit2_R4.1 | length 331.8
  Top Layer w20: SensorCircuit2_D1.2 270,470 309.53,430.47 SensorCircuit2_R4.1 307.56,378.03 SensorCircuit2_C1.2
NetSensorCircuit2_C2_2: SensorCircuit2_C2.2 SensorCircuit2_D2.2 SensorCircuit2_R5.2 SensorCircuit2_U1.6 | length 557.9
  Top Layer w20: SensorCircuit2_C2.2 -210.47,161.97 SensorCircuit2_R5.2 -200.47,240 SensorCircuit2_U1.6 30,240 60,210 SensorCircuit2_D2.2@60,10
NetSensorCircuit2_D2_1: SensorCircuit2_D2.1 SensorCircuit2_R2.2 SensorCircuit2_U1.1 | length 308
  Top Layer w20: SensorCircuit2_U1.1 132.6,94.33 SensorCircuit2_D2.1 259.06,10 309.53,60.47 SensorCircuit2_R2.2
NetSensorCircuit2_R1_1: SensorCircuit2_R1.1 SensorCircuit2_R2.1 SensorCircuit2_U1.2 | length 200.3
  Top Layer w20: SensorCircuit2_U1.2 220.47,190 SensorCircuit2_R1.1 SensorCircuit2_R2.1
NetSensorCircuit2_R3_1: SensorCircuit2_R3.1 SensorCircuit2_R7.2 SensorCircuit2_R8.2 SensorCircuit2_U1.5 | length 284.6
  Top Layer w20: SensorCircuit2_R3.1 SensorCircuit2_R8.2 SensorCircuit2_R7.2 -200.47,290 SensorCircuit2_U1.5
NetSensorCircuit3_C1_1: SensorCircuit3_C1.1 SensorCircuit3_R6.2 SensorCircuit3_U1.3 | length 188.7
  Top Layer w20: SensorCircuit3_U1.3 SensorCircuit3_R6.2 619.84,1601.97 SensorCircuit3_C1.1
NetSensorCircuit3_C1_2: SensorCircuit3_C1.2 SensorCircuit3_D1.2 SensorCircuit3_R4.1 | length 314.6
  Top Layer w20: SensorCircuit3_D1.2@500,1830 SensorCircuit3_D1.2 637.4,1830 676.93,1790.47 SensorCircuit3_R4.1 674.96,1738.03 SensorCircuit3_C1.2
NetSensorCircuit3_C2_2: SensorCircuit3_C2.2 SensorCircuit3_D2.2 SensorCircuit3_R5.2 SensorCircuit3_U1.6 | length 557.9
  Top Layer w20: SensorCircuit3_C2.2 156.93,1521.97 SensorCircuit3_R5.2 166.93,1600 SensorCircuit3_U1.6 397.4,1600 427.4,1570 SensorCircuit3_D2.2@427.4,1370
NetSensorCircuit3_D2_1: SensorCircuit3_D2.1 SensorCircuit3_R2.2 SensorCircuit3_U1.1 | length 308
  Top Layer w20: SensorCircuit3_U1.1 500,1454.33 SensorCircuit3_D2.1 626.46,1370 676.93,1420.47 SensorCircuit3_R2.2
NetSensorCircuit3_R1_1: SensorCircuit3_R1.1 SensorCircuit3_R2.1 SensorCircuit3_U1.2 | length 200.3
  Top Layer w20: SensorCircuit3_U1.2 587.87,1550 SensorCircuit3_R1.1 SensorCircuit3_R2.1
NetSensorCircuit3_R3_1: SensorCircuit3_R3.1 SensorCircuit3_R7.2 SensorCircuit3_R8.2 SensorCircuit3_U1.5 | length 284.6
  Top Layer w20: SensorCircuit3_R3.1 SensorCircuit3_R8.2 SensorCircuit3_R7.2 166.93,1650 SensorCircuit3_U1.5
NetSensorCircuit4_C1_1: SensorCircuit4_C1.1 SensorCircuit4_R6.2 SensorCircuit4_U1.3 | length 188.7
  Top Layer w20: SensorCircuit4_U1.3 SensorCircuit4_R6.2 491.67,2171.97 SensorCircuit4_C1.1
NetSensorCircuit4_C1_2: SensorCircuit4_C1.2 SensorCircuit4_D1.2 SensorCircuit4_R4.1 | length 402.6
  Top Layer w20: SensorCircuit4_D1.2@283.8,2400 SensorCircuit4_D1.2 509.23,2400 548.76,2360.47 SensorCircuit4_R4.1 546.79,2308.03 SensorCircuit4_C1.2
NetSensorCircuit4_C2_2: SensorCircuit4_C2.2 SensorCircuit4_D2.2 SensorCircuit4_R5.2 SensorCircuit4_U1.6 | length 557.9
  Top Layer w20: SensorCircuit4_C2.2 28.76,2091.97 SensorCircuit4_R5.2 38.76,2170 SensorCircuit4_U1.6 269.23,2170 299.23,2140 SensorCircuit4_D2.2@299.23,1940
NetSensorCircuit4_D2_1: SensorCircuit4_D2.1 SensorCircuit4_R2.2 SensorCircuit4_U1.1 | length 308
  Top Layer w20: SensorCircuit4_U1.1 371.83,2024.33 SensorCircuit4_D2.1 498.28,1940 548.76,1990.47 SensorCircuit4_R2.2
NetSensorCircuit4_R1_1: SensorCircuit4_R1.1 SensorCircuit4_R2.1 SensorCircuit4_U1.2 | length 200.3
  Top Layer w20: SensorCircuit4_U1.2 459.7,2120 SensorCircuit4_R1.1 SensorCircuit4_R2.1
NetSensorCircuit4_R3_1: SensorCircuit4_R3.1 SensorCircuit4_R7.2 SensorCircuit4_R8.2 SensorCircuit4_U1.5 | length 284.6
  Top Layer w20: SensorCircuit4_R3.1 SensorCircuit4_R8.2 SensorCircuit4_R7.2 38.76,2220 SensorCircuit4_U1.5
NetSensorCircuit5_C1_1: SensorCircuit5_C1.1 SensorCircuit5_R6.2 SensorCircuit5_U1.3 | length 188.7
  Top Layer w20: SensorCircuit5_U1.3 SensorCircuit5_R6.2 -318.03,2171.97 SensorCircuit5_C1.1
NetSensorCircuit5_C1_2: SensorCircuit5_C1.2 SensorCircuit5_D1.2 SensorCircuit5_R4.1 | length 173.4
  Top Layer w20: -243.68,2240 -243.68,2308.03 -241.72,2310 -241.72,2369.62 SensorCircuit5_D1.2@-211.34,2400
NetSensorCircuit5_C2_2: SensorCircuit5_C2.2 SensorCircuit5_D2.2 SensorCircuit5_R5.2 SensorCircuit5_U1.6 | length 557.9
  Top Layer w20: SensorCircuit5_C2.2 -780.94,2091.97 SensorCircuit5_R5.2 -770.94,2170 SensorCircuit5_U1.6 -540.47,2170 -510.47,2140 SensorCircuit5_D2.2@-510.47,1940
NetSensorCircuit5_D2_1: SensorCircuit5_D2.1 SensorCircuit5_R2.2 SensorCircuit5_U1.1 | length 308
  Top Layer w20: SensorCircuit5_U1.1 -437.87,2024.33 SensorCircuit5_D2.1 -311.42,1940 -260.94,1990.47 ; -241.72,1990.47 -241.72,2020
NetSensorCircuit5_R1_1: SensorCircuit5_R1.1 SensorCircuit5_R2.1 SensorCircuit5_U1.2 | length 200.3
  Top Layer w20: SensorCircuit5_U1.2 -350,2120 SensorCircuit5_R1.1 SensorCircuit5_R2.1
NetSensorCircuit5_R3_1: SensorCircuit5_R3.1 SensorCircuit5_R7.2 SensorCircuit5_R8.2 SensorCircuit5_U1.5 | length 284.6
  Top Layer w20: SensorCircuit5_R3.1 SensorCircuit5_R8.2 SensorCircuit5_R7.2 -770.94,2220 SensorCircuit5_U1.5
NetSensorCircuit6_C1_1: SensorCircuit6_C1.1 SensorCircuit6_R6.2 SensorCircuit6_U1.3 | length 188.7
  Top Layer w20: SensorCircuit6_U1.3 SensorCircuit6_R6.2 -297.09,1601.97 SensorCircuit6_C1.1
NetSensorCircuit6_C1_2: SensorCircuit6_C1.2 SensorCircuit6_D1.2 SensorCircuit6_R4.1 | length 331.8
  Top Layer w20: SensorCircuit6_D1.2 -279.53,1830 -240,1790.47 SensorCircuit6_R4.1 -241.97,1738.03 SensorCircuit6_C1.2
NetSensorCircuit6_C2_2: SensorCircuit6_C2.2 SensorCircuit6_D2.2 SensorCircuit6_R5.2 SensorCircuit6_U1.6 | length 557.9
  Top Layer w20: SensorCircuit6_C2.2 -760,1521.97 SensorCircuit6_R5.2 -750,1600 SensorCircuit6_U1.6 -519.53,1600 -489.53,1570 SensorCircuit6_D2.2@-489.53,1370
NetSensorCircuit6_D2_1: SensorCircuit6_D2.1 SensorCircuit6_R2.2 SensorCircuit6_U1.1 | length 308
  Top Layer w20: SensorCircuit6_U1.1 -416.93,1454.33 SensorCircuit6_D2.1 -290.47,1370 -240,1420.47 SensorCircuit6_R2.2
NetSensorCircuit6_R1_1: SensorCircuit6_R1.1 SensorCircuit6_R2.1 SensorCircuit6_U1.2 | length 200.3
  Top Layer w20: SensorCircuit6_U1.2 -329.05,1550 SensorCircuit6_R1.1 SensorCircuit6_R2.1
NetSensorCircuit6_R3_1: SensorCircuit6_R3.1 SensorCircuit6_R7.2 SensorCircuit6_R8.2 SensorCircuit6_U1.5 | length 284.6
  Top Layer w20: SensorCircuit6_R3.1 SensorCircuit6_R8.2 SensorCircuit6_R7.2 -750,1650 SensorCircuit6_U1.5
RX: J9.14 P1.4 | length 370
  Top Layer w20: v1(655,50) 670,50 696,24 696,-3.78 746.11,-53.89 773.89,-53.89 860,-140 v1(860,-210)
RX1: J9.10 P2.4 | length 878.6
  Top Layer w20: v1(655,-350) 770,-350 830,-290 1240,-290 v1(1430,-480)
SO1: J10.16 SensorCircuit1_R7.1 SensorCircuit1_U1.7 | length 1243.9
  Top Layer w20: v1(-655,250) -640,250 -359.53,530.47 -359.53,620.47 ; SensorCircuit1_R7.1 -309.53,880 -359.53,830 -359.53,620.47 ; SensorCircuit1_U1.7 -109.53,770 -136.22,743.31 -136.22,709.86 -156.08,690 -290,690 -359.53,620.47
SO2: J10.15 SensorCircuit2_R7.1 SensorCircuit2_U1.7 | length 881.8
  Top Layer w20: v1(-655,150) -447.78,150 -385,212.78 ; SensorCircuit2_R7.1 -297.78,300 -385,212.78 ; SensorCircuit2_U1.7 -140,190 -166.69,163.31 -166.69,129.86 -186.55,110 -340,110 -385,155 -385,212.78
SO3: J9.24 SensorCircuit3_R7.1 SensorCircuit3_U1.7 | length 1449.9
  Top Layer w20: 10,1470 180.85,1470 200.71,1489.86 200.71,1523.31 227.4,1550 SensorCircuit3_U1.7 ; SensorCircuit3_R7.1 27.4,1660 -22.6,1610 -22.6,1492.22 419.62,1050 v1(655,1050)
SO4: J9.23 SensorCircuit4_R7.1 SensorCircuit4_U1.7 | length 2205.7
  Top Layer w20: SensorCircuit4_R7.1 -100.77,2230 -150.77,2180 -150.77,2090 ; SensorCircuit4_U1.7 99.23,2120 72.54,2093.31 72.54,2059.86 52.68,2040 -100.77,2040 -150.77,2090 ; 466.53,946.53 463.05,950 ; v1(655,950) 463.05,950 ; -150.77,2090 -150.77,1840.77 -70,1760 -70,1483.05 463.05,950
SO5: J10.18 SensorCircuit5_R7.1 SensorCircuit5_U1.7 | length 3068.9
  Top Layer w20: -920,2040 -757.02,2040 -737.17,2059.86 -737.17,2093.31 -710.47,2120 SensorCircuit5_U1.7 ; SensorCircuit5_R7.1 -910.47,2230 -960.47,2180 -960.47,2072.69 -785.34,1897.56 -665.56,1897.56 -662.25,1894.25 -274.25,1894.25 -110,1730 -110,1490 -460,1140 -460,645 v1(-655,450)
SO6: J10.19 SensorCircuit6_R7.1 SensorCircuit6_U1.7 | length 1953.3
  Top Layer w20: SensorCircuit6_R7.1 -889.53,1660 -939.53,1610 -939.53,1499.53 ; v1(-655,550) -611.57,550 -500,661.57 -500,1230 -595,1325 -775,1325 -939.53,1489.53 -939.53,1499.53 ; SensorCircuit6_U1.7 -689.53,1550 -716.22,1523.31 -716.22,1489.86 -736.08,1470 -910,1470 -939.53,1499.53
TX: J9.15 P1.3 | length 511.4
  Top Layer w20: v1(655,150) 697.78,150 960,-112.22 v1(960,-210)
TX1: J9.9 P2.3 | length 915.9
  Top Layer w20: v1(655,-450) 760,-450 865.12,-344.88 1192.74,-344.88 1427.86,-580 v1(1430,-580)
VCC: C4.1 C5.2 P1.1 P2.1 S1.2 S2.3 S2.4 S3.3 S3.4 S4.3 SensorCircuit1_C3.1 SensorCircuit1_R3.2 SensorCircuit1_R4.2 SensorCircuit1_U1.8 SensorCircuit2_C3.1 SensorCircuit2_R3.2 SensorCircuit2_R4.2 SensorCircuit2_U1.8 SensorCircuit3_C3.1 SensorCircuit3_R3.2 SensorCircuit3_R4.2 SensorCircuit3_U1.8 SensorCircuit4_C3.1 SensorCircuit4_R3.2 SensorCircuit4_R4.2 SensorCircuit4_U1.8 SensorCircuit5_C3.1 SensorCircuit5_R3.2 SensorCircuit5_R4.2 SensorCircuit5_U1.8 SensorCircuit6_C3.1 SensorCircuit6_R3.2 SensorCircuit6_R4.2 SensorCircuit6_U1.8 | length 2994.2
  Top Layer w20: SensorCircuit5_C3.1 -650.47,1952.44 SensorCircuit5_U1.8 ; SensorCircuit6_C3.1 -629.53,1382.44 SensorCircuit6_U1.8 ; SensorCircuit2_C3.1 -80,22.44 SensorCircuit2_U1.8 ; SensorCircuit1_C3.1 -49.53,602.44 SensorCircuit1_U1.8 ; SensorCircuit4_C3.1 159.23,1952.44 SensorCircuit4_U1.8 ; SensorCircuit3_C3.1 287.4,1382.44 SensorCircuit3_U1.8
  Bottom Layer w20: v1(-1040,1960) -847.78,1960 -792.78,2015 -747.22,2015 -732.22,2000 v1(-590,2000) ; v1(-990,1420) -950,1460 -610,1460 v1(-570,1420) ; v1(20,660) 190,660 v1(400,450) 210,450 v1(140,380) ; v1(70,1200) v1(390,1200) ; v1(400,2330) v1(660,2330)
  other v1: -1180,-1700 -1430,-1240 -1430,-1140 -1430,-800 1430,-780 -1430,-700 1160,-210 -1080,520
pads on no net: C4.0 J1.5 J2.5 J9.2 J9.3 J9.16 J9.17 J9.18 J9.20 J9.26 J10.1 J10.3 J10.7 J10.8 J10.9 J10.13 J10.14 J10.23 S1.1 S4.1
copper on no net: | length 7.8
  Top Layer w20: v1@670,650 v1@677.78,650
  other v1: -655,-1250 655,-1150 -655,-1050 655,-1050 -655,-650 -655,-550 -655,-450 -655,-50 -655,50 1430,230 655,250 655,350 655,450 -1430,480 655,650 -655,950 655,1250

## Polygon pours and split planes (outlines as drawn)
GND on Bottom Layer "Ground" (solid, pour order 8): -1720,-2510 -1730,-2500 -1730,2480 1710,2480 1730,2500 1730,-2500
VCC on Top Layer "Vcc" (solid, pour order 10): -1730,-2500 -1730,2490 -1710,2510 1720,2510 1720,-2480 1700,-2500

## Keep-outs
Keep-Out Layer:
  lines w10: -1730,-2500 1730,-2500 1730,2500 -1730,2500 -1730,-2500

## Other copper
Top Layer:
  text "CS 301 / Group 7" at 1030,2040 h60

## Silkscreen, mask and mechanical layers (free items; w line width, h text height)
Top Overlay:
  text "-" at -697.6,1460.87 h60
  text "+" at -614.53,1375 h60
  text "M-" at 1295,1305 h40
  text "VDIO" at 455,1220 h40
  text "ChA" at 1265,1200 h40
  text "Vbat" at -1360,1195 h40
  text "GND" at -490,1160 h40
  text "3.0" at -590,1130 h40
  text "GND" at 460,1110 h40
  text "GND" at 1260,1100 h40
  text "Ibat" at -1375,1055 h40
  text "+5V" at 1260,1035 h40
  text "3.1" at -590,1030 h40
  text "1.7" at 465,1030 h40
  text "3.2" at -590,930 h40
  text "1.6" at 465,930 h40
  text "ChB" at 1265,870 h40
  text "D1" at -1370,855 h40
  text "1.5" at 465,835 h40
  text "3.3" at -590,830 h40
  text "M+" at 1300,805 h40
  text "IN2" at -1375,755 h40
  text "3.4" at -590,730 h40
  text "1.4" at 465,730 h40
  text "IN1" at -1375,655 h40
  text "3.5" at -590,630 h40
  text "1.3" at 465,630 h40
  text "SLW" at -1380,565 h40
  text "1.2" at 465,535 h40
  text "3.6" at -590,530 h40
  text "INV" at -1375,465 h40
  text "3.7" at -590,430 h40
  text "1.1" at 465,430 h40
  text "D2" at 1295,415 h40
  text "EN" at -1370,370 h40
  text "15.0" at -595,330 h40
  text "1.0" at 465,330 h40
  text "EN" at 1290,310 h40
  text "D2" at -1370,260 h40
  text "15.1" at -590,230 h40
  text "12.0" at 465,230 h40
  text "INV" at 1270,220 h40
  text "12.1" at 465,135 h40
  text "15.2" at -595,130 h40
  text "SLW" at 1270,105 h40
  text "15.3" at -595,30 h40
  text "12.2" at 465,25 h40
  text "IN1" at 1285,15 h40
  text "15.4" at -595,-70 h40
  text "12.3" at 465,-70 h40
  text "IN2" at 1270,-90 h40
  text "M+" at -1365,-130 h40
  text "15.5" at -595,-170 h40
  text "12.4" at 465,-170 h40
  text "D1" at 1305,-210 h40
  text "ChB" at -1370,-230 h40
  text "0.0" at -590,-270 h40
  text "12.5" at 465,-270 h40
  text "+5V" at -1370,-325 h40
  text "0.1" at -590,-370 h40
  text "12.6" at 465,-370 h40
  text "GND" at -1365,-430 h40
  text "0.2" at -590,-470 h40
  text "12.7" at 465,-470 h40
  text "ChA" at -1365,-530 h40
  text "0.3" at -590,-570 h40
  text "2.7" at 465,-570 h40
  text "M-" at -1365,-625 h40
  text "0.4" at -590,-670 h40
  text "2.6" at 465,-670 h40
  text "0.5" at -590,-770 h40
  text "2.5" at 465,-770 h40
  text "0.6" at -590,-870 h40
  text "2.4" at 465,-875 h40
  text "0.7" at -590,-970 h40
  text "2.3" at 465,-970 h40
  text "RST" at -590,-1070 h40
  text "2.2" at 465,-1070 h40
  text "GND" at -590,-1135 h40
  text "2.1" at 465,-1170 h40
  text "2.0" at 465,-1270 h40
  text "-" at 1320,-1280 h60 r180
  text "VDD" at -590,-1305 h40
  text "+" at 1330,-1415 h60 r90